# Altium PCB pale_sieve.PcbDoc (part 2 of 2)
Units mm, origin at the board's own origin, x right, y up, seen from the top; angles counter-clockwise.
Board outline 51 x 51 mm, 6 copper layers (Top, L2, L3, L4, L5, Bottom), stack 1.546 mm thick; 73 components, 40 nets, 184 pads, 29 vias.
Unrouted connection lines stored in the file: 36.
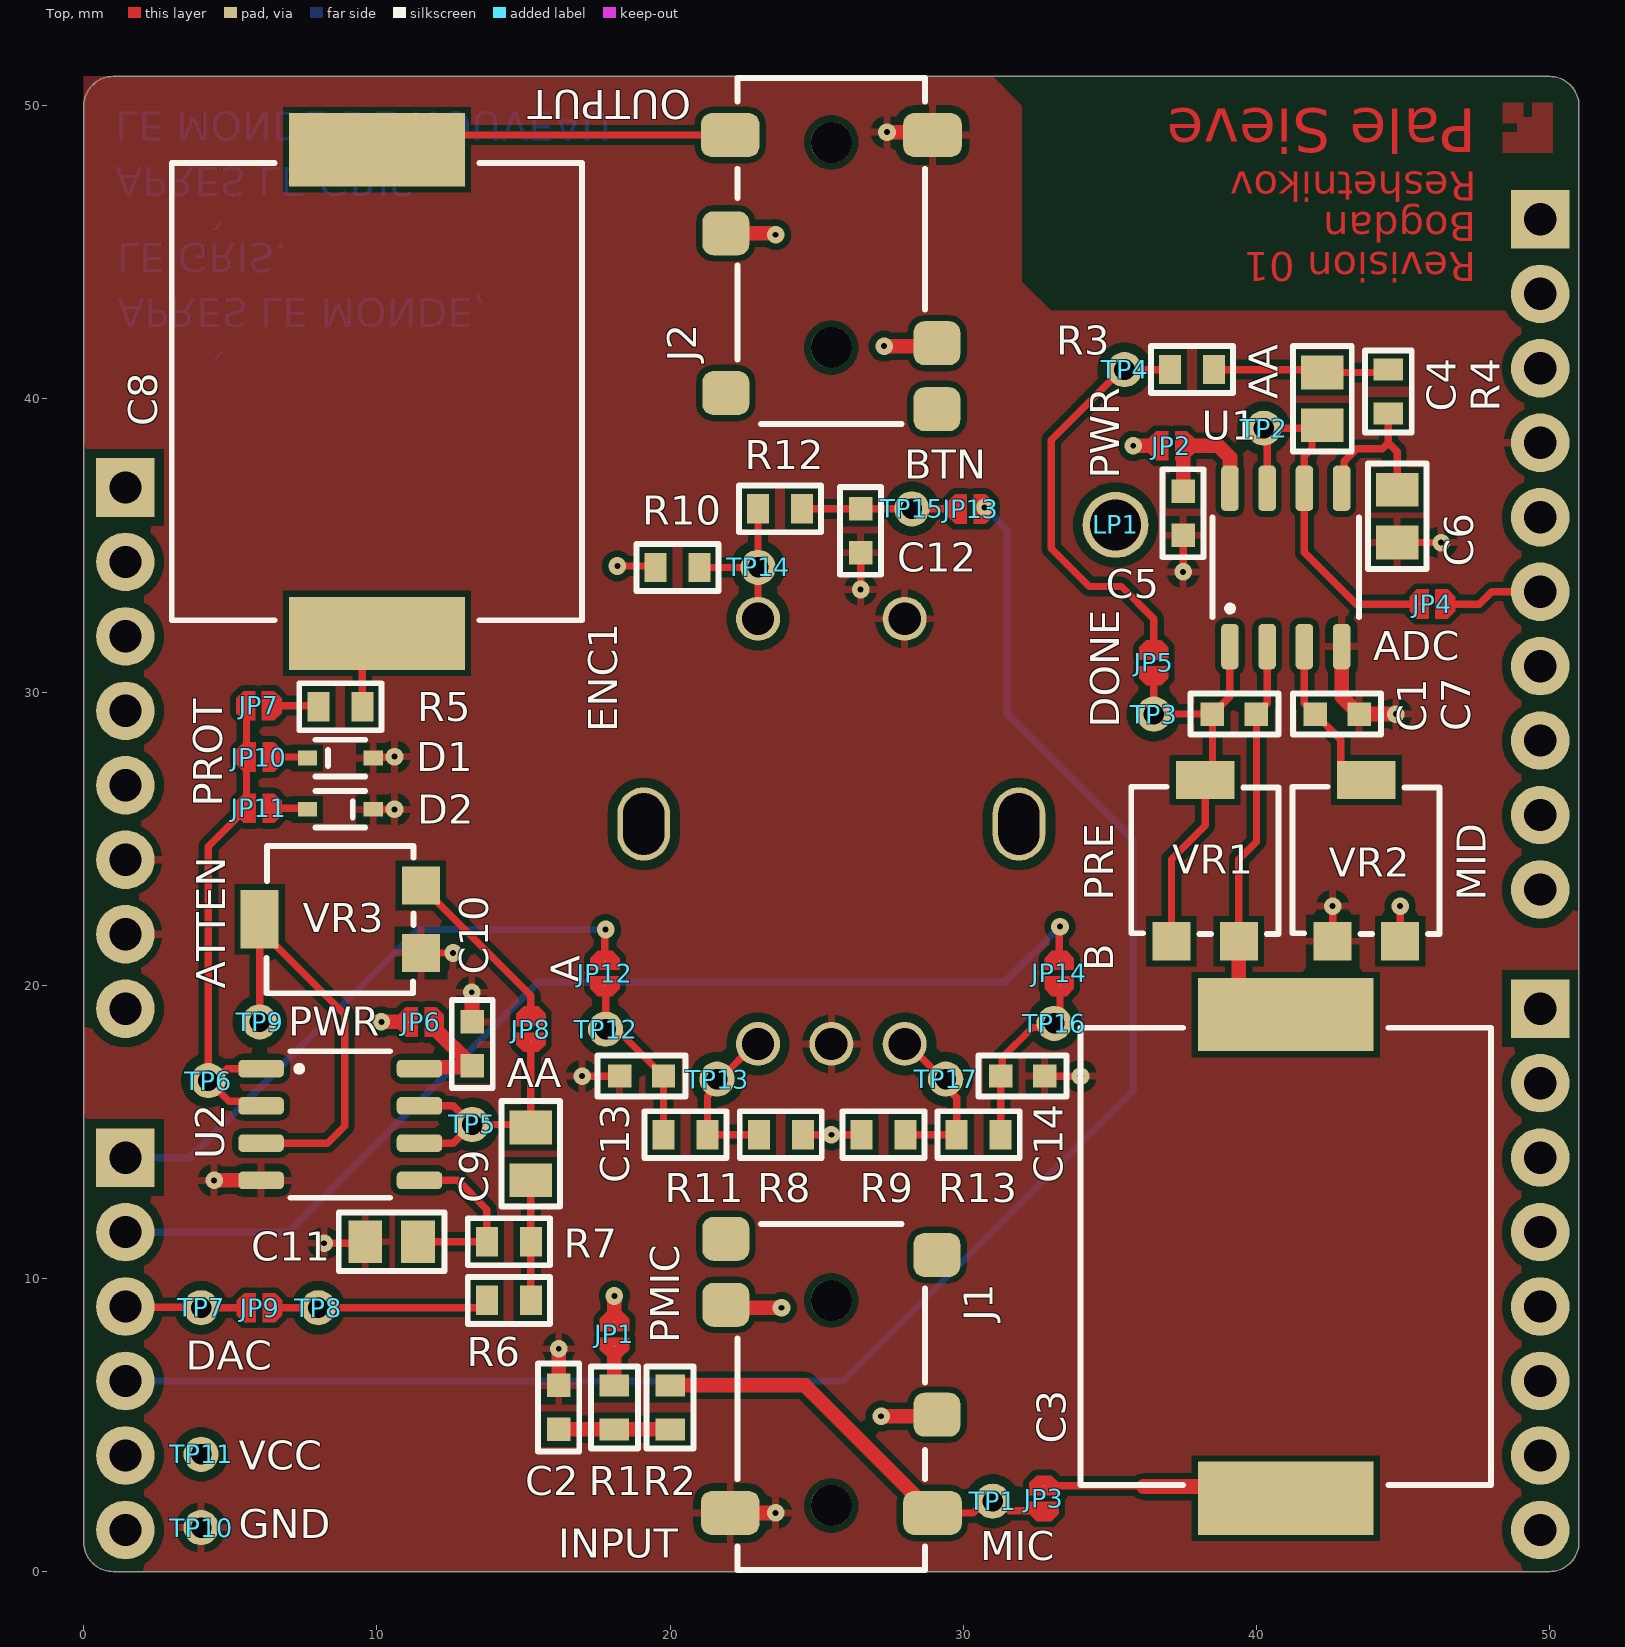
[diagram p0: Top view]

## Other copper (continued)
Bottom: (continued)
  text "LE MONDE DE NOUVEAU." at 1.09,49.796 h1 r180
  text "APRES LE GRIS," at 1.081,47.896 h1 r180
  text "`" at 4.296,46.85 h1 r180
  text "LE GRIS." at 1.14,45.31 h1 r180
  text "APRES LE MONDE," at 1.147,43.429 h1 r180
  text "`" at 4.318,42.428 h1 r180

## Silkscreen, mask and mechanical layers (free items; w line width, h text height)
Top Overlay:
  text "OUTPUT" at 20.72,50.52 h1 r180
  text "AA" at 40.72,39.98 h1 r90
  text "BTN" at 27.98,37.28 h1
  text "PWR" at 35.32,37.28 h1 r90
  text "ADC" at 43.98,31.08 h1
  text "DONE" at 35.32,28.78 h1 r90
  text "PROT" at 4.72,26.08 h1 r90
  text "PRE" at 35.12,22.88 h1 r90
  text "MID" at 47.82,22.88 h1 r90
  text "B" at 35.12,20.48 h1 r90
  text "A" at 16.92,20.08 h1 r90
  text "ATTEN" at 4.82,19.88 h1 r90
  text "PWR" at 6.98,18.28 h1
  text "AA" at 14.43,16.517 h1
  text "PMIC" at 20.32,7.78 h1 r90
  text "DAC" at 3.48,6.88 h1
  text "VCC" at 5.28,3.48 h1
  text "GND" at 5.28,1.13 h1
  text "INPUT" at 16.18,0.48 h1
  text "MIC" at 30.58,0.38 h1
Top Solder:
  text "Pale Sieve" at 47.493,49.911 h1.5 r180
  text "Reshetnikov" at 47.515,47.752 h1 r180
  text "Bogdan" at 47.5,46.367 h1 r180
  text "Revision 01" at 47.5,45 h1 r180
Bottom Solder:
  text "LE MONDE DE NOUVEAU." at 1.072,49.784 h1 r180
  text "APRES LE GRIS," at 1.088,47.906 h1 r180
  text "`" at 4.296,46.849 h1 r180
  text "LE GRIS." at 1.142,45.313 h1 r180
  text "APRES LE MONDE," at 1.142,43.416 h1 r180
  text "`" at 4.314,42.412 h1 r180
Mechanical 1:
  the board outline again, w0.15